# Altium PCB LIA.PcbDoc
Units mm, origin at the board's own origin, x right, y up, seen from the top; angles counter-clockwise.
Board outline 100 x 60 mm, 2 copper layers (Top Layer, Bottom Layer); 85 components, 73 nets, 272 pads, 0 vias.
Unrouted connection lines stored in the file: 197.
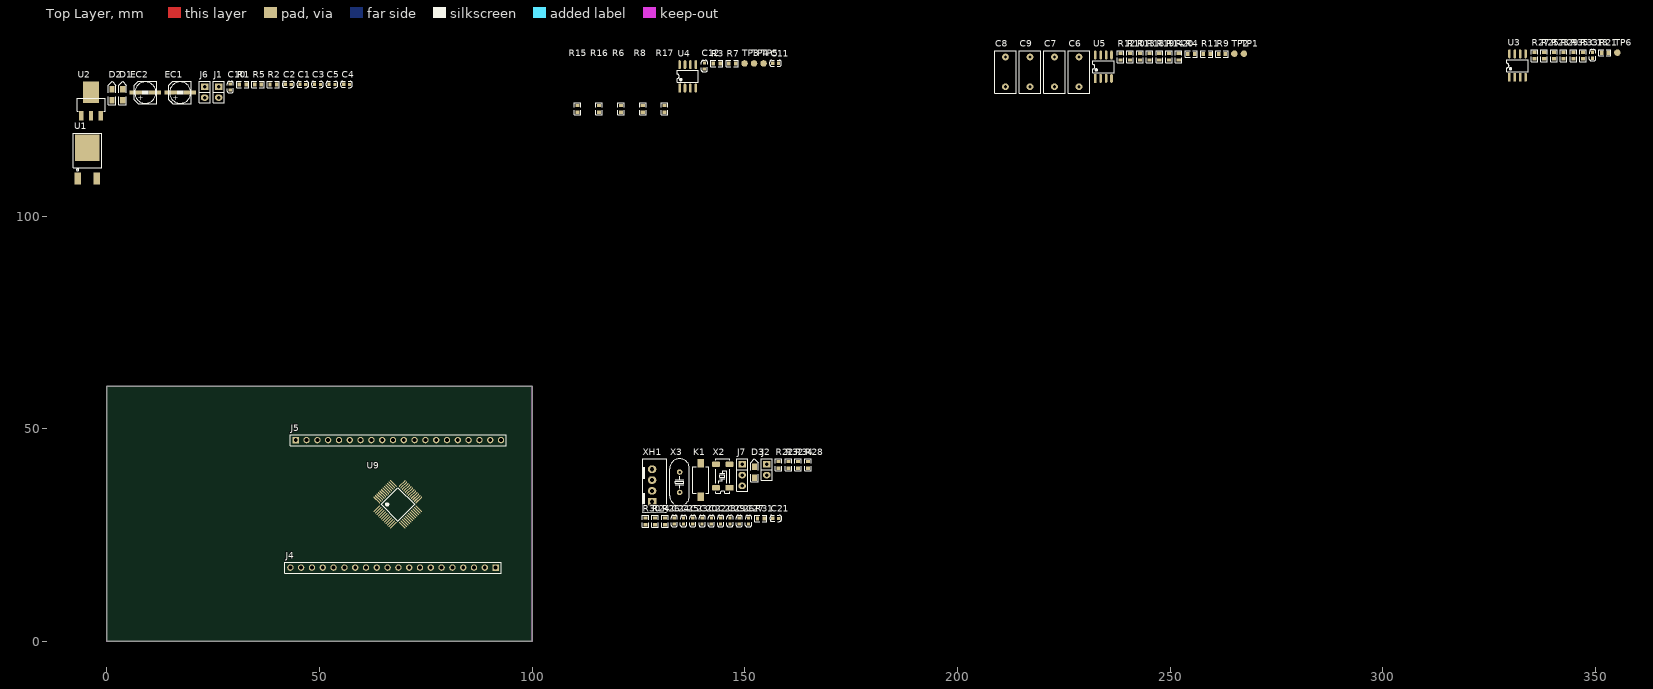
[diagram p0: Top Layer view]
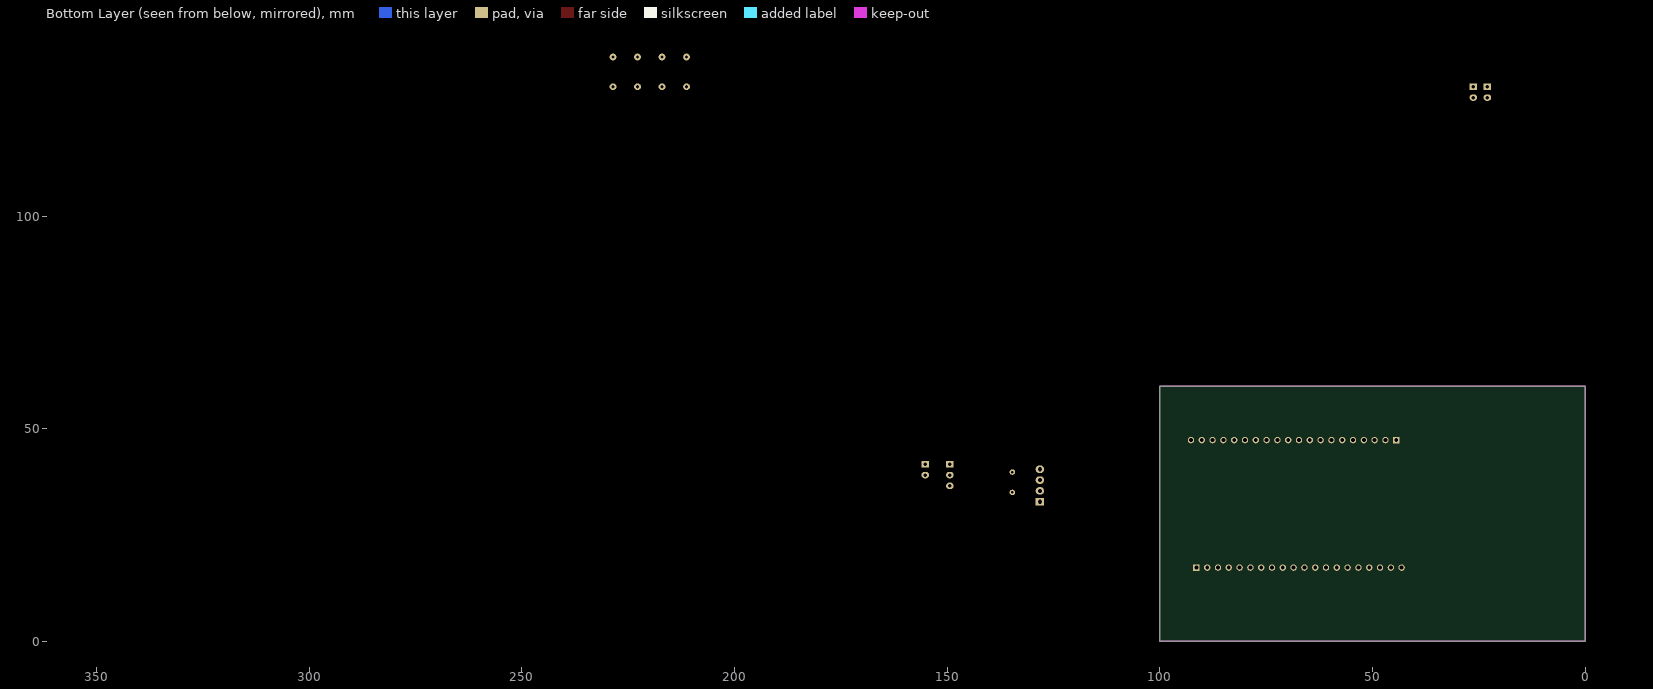
[diagram p1: Bottom Layer view, seen from below]

## Layer stack, top to bottom
Top Solder: solder mask 0.0102, Solder Resist, Dk 3.5
Top Layer: signal copper 0.0356
Dielectric 1: dielectric 0.32, FR-4, Dk 4.8
Bottom Layer: signal copper 0.0356
Bottom Solder: solder mask 0.0102, Solder Resist, Dk 3.5

## Board outline
0,0 100,0 100,60 0,60

## Design rules (kind name [scope] priority, off if disabled: settings)
Clearance [All] p1: gap=0.254 ignorepadtopadclearanceinfootprint=TRUE except(0: Arc-Hole Track-Hole SMDPad-Hole THPad-Hole Via-Hole Fill-Hole Poly-Hole Region-Hole Text-Hole)
PolygonConnect [All] p1: connectstyle=Relief reliefconductorwidth=0.254 reliefentries=4 polygonreliefangle="90 Angle" airgapwidth=0.254
RoutingVias [All] p1: holewidth=0.711 width=1.27 viastyle="Through Hole" minholewidth=0.711 minwidth=1.27 maxholewidth=0.711 maxwidth=1.27
SolderMaskExpansion [All] p1: expansion=0.102 istentingtop=FALSE
Width [All] p1: maxlimit=0.254 minlimit=0.254 preferedwidth=0.254
30 further rules are at their usual default settings.

## Components (designator, comment, footprint, x,y, rotation, side; value= is the part's Value field where it differs from the comment)
C1 "0.33uF" 0603C 45.401,130.987 r0 top
C2 "0.1uF" 0603C 41.974,130.987 r0 top
C3 "10uF" 0603C 48.829,130.987 r0 top
C4 "10uF" 0603C 55.683,130.987 r0 top
C5 "0.1uF" 0603C 52.256,130.987 r0 top
C6 "1uF" DIP-7 228.556,130.401 r90 top
C7 "1uF" DIP-7 222.794,130.401 r90 top
C8 "1uF" DIP-7 211.27,130.401 r90 top
C9 "1uF" DIP-7 217.032,130.401 r90 top
C10 "0.1uF" 0603C 29.018,129.626 r90 top
C11 "100pF" 0603C 156.534,135.94 r0 top
C12 "1uF" 0603C 140.479,134.579 r90 top
C13 "0.1uF" 0603C 349.267,137.119 r90 top
C20 "0.1uF" 0603C 139.934,27.608 r90 top
C21 "1uF" 0603C 156.584,28.969 r0 top
C22 "22pF" 0603C 142.116,27.608 r90 top
C23 "22pF" 0603C 137.753,27.608 r90 top
C24 "1uF" 0603C 133.39,27.608 r90 top
C25 "1uF" 0603C 135.572,27.608 r90 top
C26 "1uF" 0603C 148.66,27.608 r90 top
C27 "1uF" 0603C 150.841,27.608 r90 top
C28 "22pF" 0603C 144.297,27.608 r90 top
C29 "22pF" 0603C 146.478,27.608 r90 top
D1 "LEDR/0805" LED-0805R 3.737,127.243 r90 top
D2 "LEDR/0805" LED-0805R 1.248,127.243 r90 top
D3 "LEDY/0805" LED-0805Y 152.269,38.506 r90 top
EC1 "47uF" SMD-EC5.0X5.3X5.4 15.025,129.032 r0 top
EC2 "47uF" SMD-EC5.0X5.3X5.4 6.837,129.032 r0 top
J1 "Pin HDR1X2" "Pin HDR1X2/2.54mm-S" 26.31,130.392 r0 top
J2 "Pin HDR1X2" "Pin HDR1X2/2.54mm-S" 155.165,41.656 r0 top
J4 "Pin HDR1X20" "Pin HDR1X20/2.54mm-S" 91.422,17.362 r180 top
J5 "Pin HDR1X20" "Pin HDR1X20/2.54mm-S" 44.432,47.334 r0 top
J6 "Pin HDR1X2" "Pin HDR1X2/2.54mm-S" 23.008,130.392 r0 top
J7 "Pin HDR1X3" "Pin HDR1X3/2.54mm-S" 149.374,41.656 r0 top
K1 "KEY" SMD-3X6X2.5 139.63,34.077 r90 top
R1 "30R" 0603R 31.159,130.9 r0 top
R2 "20K" 0603R 38.372,130.9 r0 top
R3 "0R" 0603R 142.62,135.853 r0 top
R4 "0R" 0603R 254.165,138.139 r0 top
R5 "20K" 0603R 34.765,130.9 r0 top
R6 "10K" 0603R 120.886,124.398 r90 top
R7 "0R" 0603R 146.227,135.853 r0 top
R8 "10K" 0603R 126.017,124.398 r90 top
R9 "300K" 0603R 261.378,138.139 r0 top
R10 "75K" 0603R 240.576,136.691 r90 top
R11 "270K" 0603R 257.771,138.139 r0 top
R12 "68K" 0603R 238.29,136.691 r90 top
R13 "150R" 0603R 242.862,136.691 r90 top
R14 "150R" 0603R 249.72,136.691 r90 top
R15 "10M" 0603R 110.624,124.398 r90 top
R16 "8.2K" 0603R 115.755,124.398 r90 top
R17 "8.2K" 0603R 131.148,124.398 r90 top
R18 "0R" 0603R 245.148,136.691 r90 top
R19 "70R" 0603R 247.434,136.691 r90 top
R20 "50R" 0603R 252.006,136.691 r90 top
R21 "49K" 0603R 351.408,138.393 r0 top
R22 "0R" 0603R 157.959,40.716 r90 top
R23 "1K" 0603R 340.21,136.945 r90 top
R24 "0R" 0603R 128.905,27.434 r90 top
R25 "1M" 0603R 337.924,136.945 r90 top
R26 "10K" 0603R 131.191,27.434 r90 top
R27 "1K" 0603R 335.638,136.945 r90 top
R28 "10K" 0603R 164.817,40.716 r90 top
R29 "10K" 0603R 342.496,136.945 r90 top
R30 "510R" 0603R 126.619,27.434 r90 top
R31 "1M" 0603R 152.982,28.882 r0 top
R32 "0R" 0603R 160.245,40.716 r90 top
R33 "10K" 0603R 347.068,136.945 r90 top
R34 "0R" 0603R 162.531,40.716 r90 top
R35 "0R" 0603R 344.782,136.945 r90 top
TP1 "测试点" TP 267.322,138.165 r0 top
TP2 "测试点" TP 265.087,138.165 r90 top
TP3 "测试点" TP 149.935,135.879 r90 top
TP4 "测试点" TP 152.17,135.879 r90 top
TP5 "测试点" TP 154.405,135.879 r90 top
TP6 "测试点" TP 355.116,138.419 r90 top
U1 "LM7805" TO252 -6.731,108.83 r0 top
U2 "AMS1117" SOT223 -3.68,123.56 r0 top
U3 "OPA2140" SOP8 329.736,132.631 r90 top
U4 "OPA2140" SOP8 134.664,130.091 r90 top
U5 "OPA2140" SOP8 232.388,132.377 r90 top
U9 "STM32G431CBT6" "LQFP48 7X7" 68.435,32.221 r315 top
X2 "32.768K" "OSC MC-306" 144.817,38.887 r90 top
X3 "8M" "OSC HC-49S" 134.669,37.426 r90 top
XH1 "XH4" XH4/2.54mm/180 128.207,32.856 r90 top

## Footprints (in the part's own frame and the unit in brackets; to place one, negate y for a bottom-side part, rotate by r counter-clockwise, add the part's x,y. Pads: shape width x height; smd on the part's side, far side on the other; paste and mask are expansions set on the pad)
0603C [mil]
  rect 30x30 smd: 1(0.21,-0.35) 2(55.21,-1.35)
  silkscreen extent -26,-30 81,28, body extent -1,-15 62,17, height 12
0603R [mm]
  rect 0.8x0.965 smd: 1(0,0) 2(1.6,0)
  silkscreen extent -0.64,-0.76 2.21,0.76, body extent -0.04,-0.41 1.56,0.41, height 0.45
DIP-7 [mm]
  round 1.6 hole 0.8: 1(0,0) 2(7,0)
  silkscreen extent -1.5,-2.5 8.5,2.5
LED-0805R [mil]
  rect 60x50 smd: A(0,0) K(100,0)
  silkscreen extent -40,-35 175,35, body extent 11,-24 89,25, height 32
LED-0805Y [mil]
  rect 60x50 smd: A(0,0) K(100,0)
  silkscreen extent -40,-35 175,35, body extent 11,-26 89,23, height 32
"LQFP48 7X7" [mm]
  oval 0.3x2.1 smd: 1(-2.75,-4.227) 2(-2.25,-4.227) 3(-1.75,-4.227) 4(-1.25,-4.227) 5(-0.75,-4.227) 6(-0.25,-4.227) 7(0.25,-4.227) 8(0.75,-4.227) 9(1.25,-4.227) 10(1.75,-4.227) 11(2.25,-4.227) 12(2.75,-4.227) 25(2.75,4.202) 26(2.25,4.202) 27(1.75,4.202) 28(1.25,4.202) 29(0.75,4.202) 30(0.25,4.202) 31(-0.25,4.202) 32(-0.75,4.202) 33(-1.25,4.202) 34(-1.75,4.202) 35(-2.25,4.202) 36(-2.75,4.202)
  oval 2.1x0.3 smd: 13(4.227,-2.75) 14(4.227,-2.25) 15(4.227,-1.75) 16(4.227,-1.25) 17(4.227,-0.75) 18(4.227,-0.25) 19(4.227,0.25) 20(4.227,0.75) 21(4.227,1.25) 22(4.227,1.75) 23(4.227,2.25) 24(4.227,2.75) 37(-4.227,2.75) 38(-4.227,2.25) 39(-4.227,1.75) 40(-4.227,1.25) 41(-4.227,0.75) 42(-4.227,0.25) 43(-4.227,-0.25) 44(-4.227,-0.75) 45(-4.227,-1.25) 46(-4.227,-1.75) 47(-4.227,-2.25) 48(-4.227,-2.75)
  silkscreen extent -2.79,-2.79 2.79,2.79, body extent -4.51,-4.5 4.5,4.5, height 1.45
"OSC HC-49S" [mm]
  round 1.3 hole 0.6: 1(-2.4,0) 2(2.4,0)
  silkscreen extent -5.52,-2.32 5.52,2.33, body extent -5.53,-2.29 5.53,2.36, height 4.13
"OSC MC-306" [mm]
  rect 1.3x1.9 smd: 1(-2.75,-1.6)
  rrect50% 1.3x1.9 smd: 2(2.75,-1.6) 3(2.75,1.6) 4(-2.75,1.6)
  silkscreen extent -4.06,-1.65 4.06,1.65, body extent -4,-1.52 4,1.74, height 2.56
"Pin HDR1X2/2.54mm-S" [mil]
  rect 70x60 hole 32: 1(0,0)
  oval 70x60 hole 32: 2(0,-100)
  silkscreen extent -50,-150 50,50, body extent -50,-150 50,50, height 336
"Pin HDR1X3/2.54mm-S" [mil]
  rect 70x60 hole 32: 1(0,0)
  oval 70x60 hole 32: 2(0,-100) 3(0,-200)
  silkscreen extent -50,-250 50,50, body extent -50,-250 50,50, height 336
"Pin HDR1X20/2.54mm-S" [mm]
  rect 1.5x1.5 hole 0.9: 1(0,0)
  round 1.5 hole 0.9: 2(2.54,0) 3(5.08,0) 4(7.62,0) 5(10.16,0) 6(12.7,0) 7(15.24,0) 8(17.78,0) 9(20.32,0) 10(22.86,0) 11(25.4,0) 12(27.94,0) 13(30.48,0) 14(33.02,0) 15(35.56,0) 16(38.1,0) 17(40.64,0) 18(43.18,0) 19(45.72,0) 20(48.26,0)
  silkscreen extent -1.27,-1.27 49.53,1.27, body extent -1.27,-1.27 49.53,1.27, height 7.58
SMD-3X6X2.5 [mm]
  rect 2x1.5 smd: 1(-0.059,-0.02) 3(7.874,0)
  silkscreen extent 0.73,-1.9 7.03,1.9, body extent -0.19,-1.78 7.81,1.72, height 2.59
SMD-EC5.0X5.3X5.4 [mm]
  rect 3x1 smd: 1(0,0) 2(4.477,0)
  silkscreen extent -0.41,-2.65 4.89,2.66, body extent -0.79,-2.65 5.11,2.65, height 5.41
SOP8 [mm]
  rect 2.1x0.6 smd: 1(0,0)
  oval 2.1x0.6 smd: 2(0,-1.27) 3(0,-2.54) 4(0,-3.81) 5(5.5,-3.81) 6(5.5,-2.54) 7(5.5,-1.27) 8(5.5,0)
  silkscreen extent 1.35,-4.41 4.15,0.6, body extent -0.36,-4.37 5.64,0.63, height 1.9
SOT223 [mil]
  rect 40x90 smd: 1(-90,0) 2(0,0) 3(90,0)
  rect 150x200 smd: 2(0,220)
  silkscreen extent -130,43 130,163, body extent -130,-30 126,246, height 65
TO252 [mil] "252晶体管"
  rect 60x115 smd: 1(-4.55,0.23)
  rect 230x245 smd: 2(85,285.35)
  rect 60x110 smd: 3(173.45,-0.77)
  silkscreen extent -43,70 220,420, body extent -41,5 215,375, height 91
TP [mil]
  round 60 smd: 1(0,0)
XH4/2.54mm/180 [mm]
  rect 1.8x2 hole 1: 1(0,0)
  oval 1.8x2 hole 1: 2(2.54,0) 3(5.08,0) 4(7.62,0)
  silkscreen extent -2.45,-3.4 10.07,2.35, body extent -2.39,-3.3 10.01,2.45, height 7

## Part data
C1 C2 C3 C4 C5 C6 C7 C8 C9 C10 C11 C12 C13 C20 C21 C22 C23 C24 C25 C26 C27 C28 C29: library part CAP, "无极性电容"
D1 D2 D3: library part LED
EC1 EC2: library part SMD_ECAP, "贴片电解电容"
R1 R2 R3 R4 R5 R6 R7 R8 R9 R10 R11 R12 R13 R14 R15 R16 R17 R18 R19 R20 R21 R22 R23 R24 R25 R26 R27 R28 R29 R30 R31 R32 R33 R34 R35: library part RES
U2: "三端稳压芯片"
U3 U4 U5: library part NE5532
X2: library part XTAL-MC-4P, "MC系列4脚晶振"
X3: library part XTAL-2P, "2脚无源脚晶振"

## Nets (pads, with @x,y where several pads share a name; then routed paths per layer and width w, separated by ;. In a path a pad name is that pad's centre, name@x,y a point inside that pad or via, vN(x,y) a via of type N, cw(c..) or ccw(c..) an arc to the next point about the centre after c; other vN are vias at no path point)
+3V3: C4.2 C20.2 C24.2 C25.2 C26.2 C27.2 D3.A J2.2 J4.2 J5.1 J7.1 R28.1 R29.2 U2.2 U9.21 U9.24 U9.36 U9.48 XH1.4
+5V: C2.2 C3.2 U1.3 U2.3
+12V: C5.2 D1.A EC1.1 J6.2 R1.1 U3.8 U4.8 U5.8
-12V: C10.1 EC2.2 J1.1 R2.2 U3.4 U4.4 U5.4
BOOT0: J5.4 R26.1 U9.45
BPF_IN: R4.2 R10.2
BPF_OUT: C7.2 R11.2 R18.1 R34.1 R35.1 TP1.1 U5.7
CDA_IN: C13.1 R35.2
CDA_OUT: R21.2 R22.1 TP6.1 U3.1
GND: C1.1 C2.1 C3.1 C4.1 C5.1 C10.2 C20.1 C21.1 C22.2 C23.2 C24.1 C25.1 C26.1 C27.1 C28.2 C29.2 D2.A EC1.2 EC2.1 J1.2 J4.1 J5.2 J6.1 J7.3 K1.1 R5.2 R6.2 R19.2 R20.2 R33.1 U1.2 U2.1 U3.5 U4.3 U4.5 U5.3 U5.5 U9.19 U9.23 U9.35 U9.47 XH1.1
IV_IN: R7.2 TP5.1
IV_OUT: C11.1 R3.1 R6.1 R8.2 R15.2 R24.1 TP3.1
LPF_IN: R3.2 R17.1
LPF_OUT: C12.1 R4.1 R16.1 R32.1 TP4.1 U4.7
MCUVREF+: J2.1 J4.4 U9.20
NetC1_2: C1.2 R1.2 U1.1
NetC6_1: C6.1 R9.2 R12.1 TP2.1 U5.1
NetC6_2: C6.2 C8.1 R10.1 R13.1
NetC7_1: C7.1 C9.2 R12.2 R14.1
NetC8_2: C8.2 R9.1 U5.2
NetC9_1: C9.1 R11.1 U5.6
NetC11_2: C11.2 R7.1 R15.1 U4.2
NetC12_2: C12.2 R16.2 R17.2 U4.6
NetC13_2: C13.2 R23.1 R25.1
NetD1_K: D1.K R5.1
NetD2_K: D2.K R2.1
NetD3_K: D3.K R30.1
NetJ7_2: J7.2 R26.2
NetR8_1: R8.1 U4.1
NetR13_2: R13.2 R19.1
NetR14_2: R14.2 R20.1
NetR21_1: R21.1 R27.1 U3.2
NetR23_2: R23.2 U3.3
NetR25_2: R25.2 R27.2 R29.1 R33.2
NetU3_6: U3.6 U3.7
OSC_IN: C28.1 R31.2 U9.5 X3.2
OSC_OUT: C29.1 R31.1 U9.6 X3.1
PA0: J4.15 R18.2 R22.2 U9.8
PA1: J4.14 R24.2 U9.9
PA2: J4.13 R32.2 U9.10
PA3: J4.12 R34.2 U9.11
PA4: J4.11 U9.12
PA5: J4.10 U9.13
PA6: J4.9 U9.14
PA7: J4.8 U9.15
PA8: J5.15 U9.30
PA9: J5.14 U9.31
PA10: J5.13 U9.32
PA11: J5.12 U9.33
PA12: J5.11 U9.34
PA15: J5.10 U9.39
PB0: J4.7 U9.16
PB1: J4.6 U9.17
PB2: J4.5 U9.18
PB3: J5.9 U9.40
PB4: J5.8 U9.41
PB5: J5.7 U9.42
PB6: J5.6 U9.43
PB7: J5.5 U9.44
PB9: J5.3 U9.46
PB10: J4.3 U9.22
PB11: J5.20 U9.25
PB12: J5.19 U9.26
PB13: J5.18 U9.27
PB14: J5.17 U9.28
PB15: J5.16 U9.29
PC13: J4.19 R30.2 U9.2
PC14: C22.1 J4.18 U9.3 X2.4
PC15: C23.1 J4.17 U9.4 X2.1
RESET: C21.2 J4.16 K1.3 R28.2 U9.7
SWCLK: U9.38 XH1.2
SWDIO: U9.37 XH1.3
VBAT: J4.20 U9.1
pads on no net: X2.2 X2.3

## Keep-outs
Keep-Out Layer:
  the board outline again, w0.254

## Text inside footprints (layer, text, board x,y; h text height)
EC1: Top Overlay "+" at 15.47,127.255 h1.2
EC2: Top Overlay "+" at 7.282,127.255 h1.2